# Altium PCB ZYNQ-HS-DEV-PCB.PcbDoc (part 2 of 10)
Units mm, origin at the board's own origin, x right, y up, seen from the top; angles counter-clockwise.
Board outline 125.25 x 111 mm, 10 copper layers (S1 (SIG), S2 (GND), S3 (SIG), S4 (GND), S5 (PWR), S6 (SIG), S7 (GND), S8 (SIG), S9 (GND), S10 (SIG)), stack 1.597 mm thick; 539 components, 408 nets, 2443 pads, 876 vias.
Unrouted connection lines stored in the file: 1310.
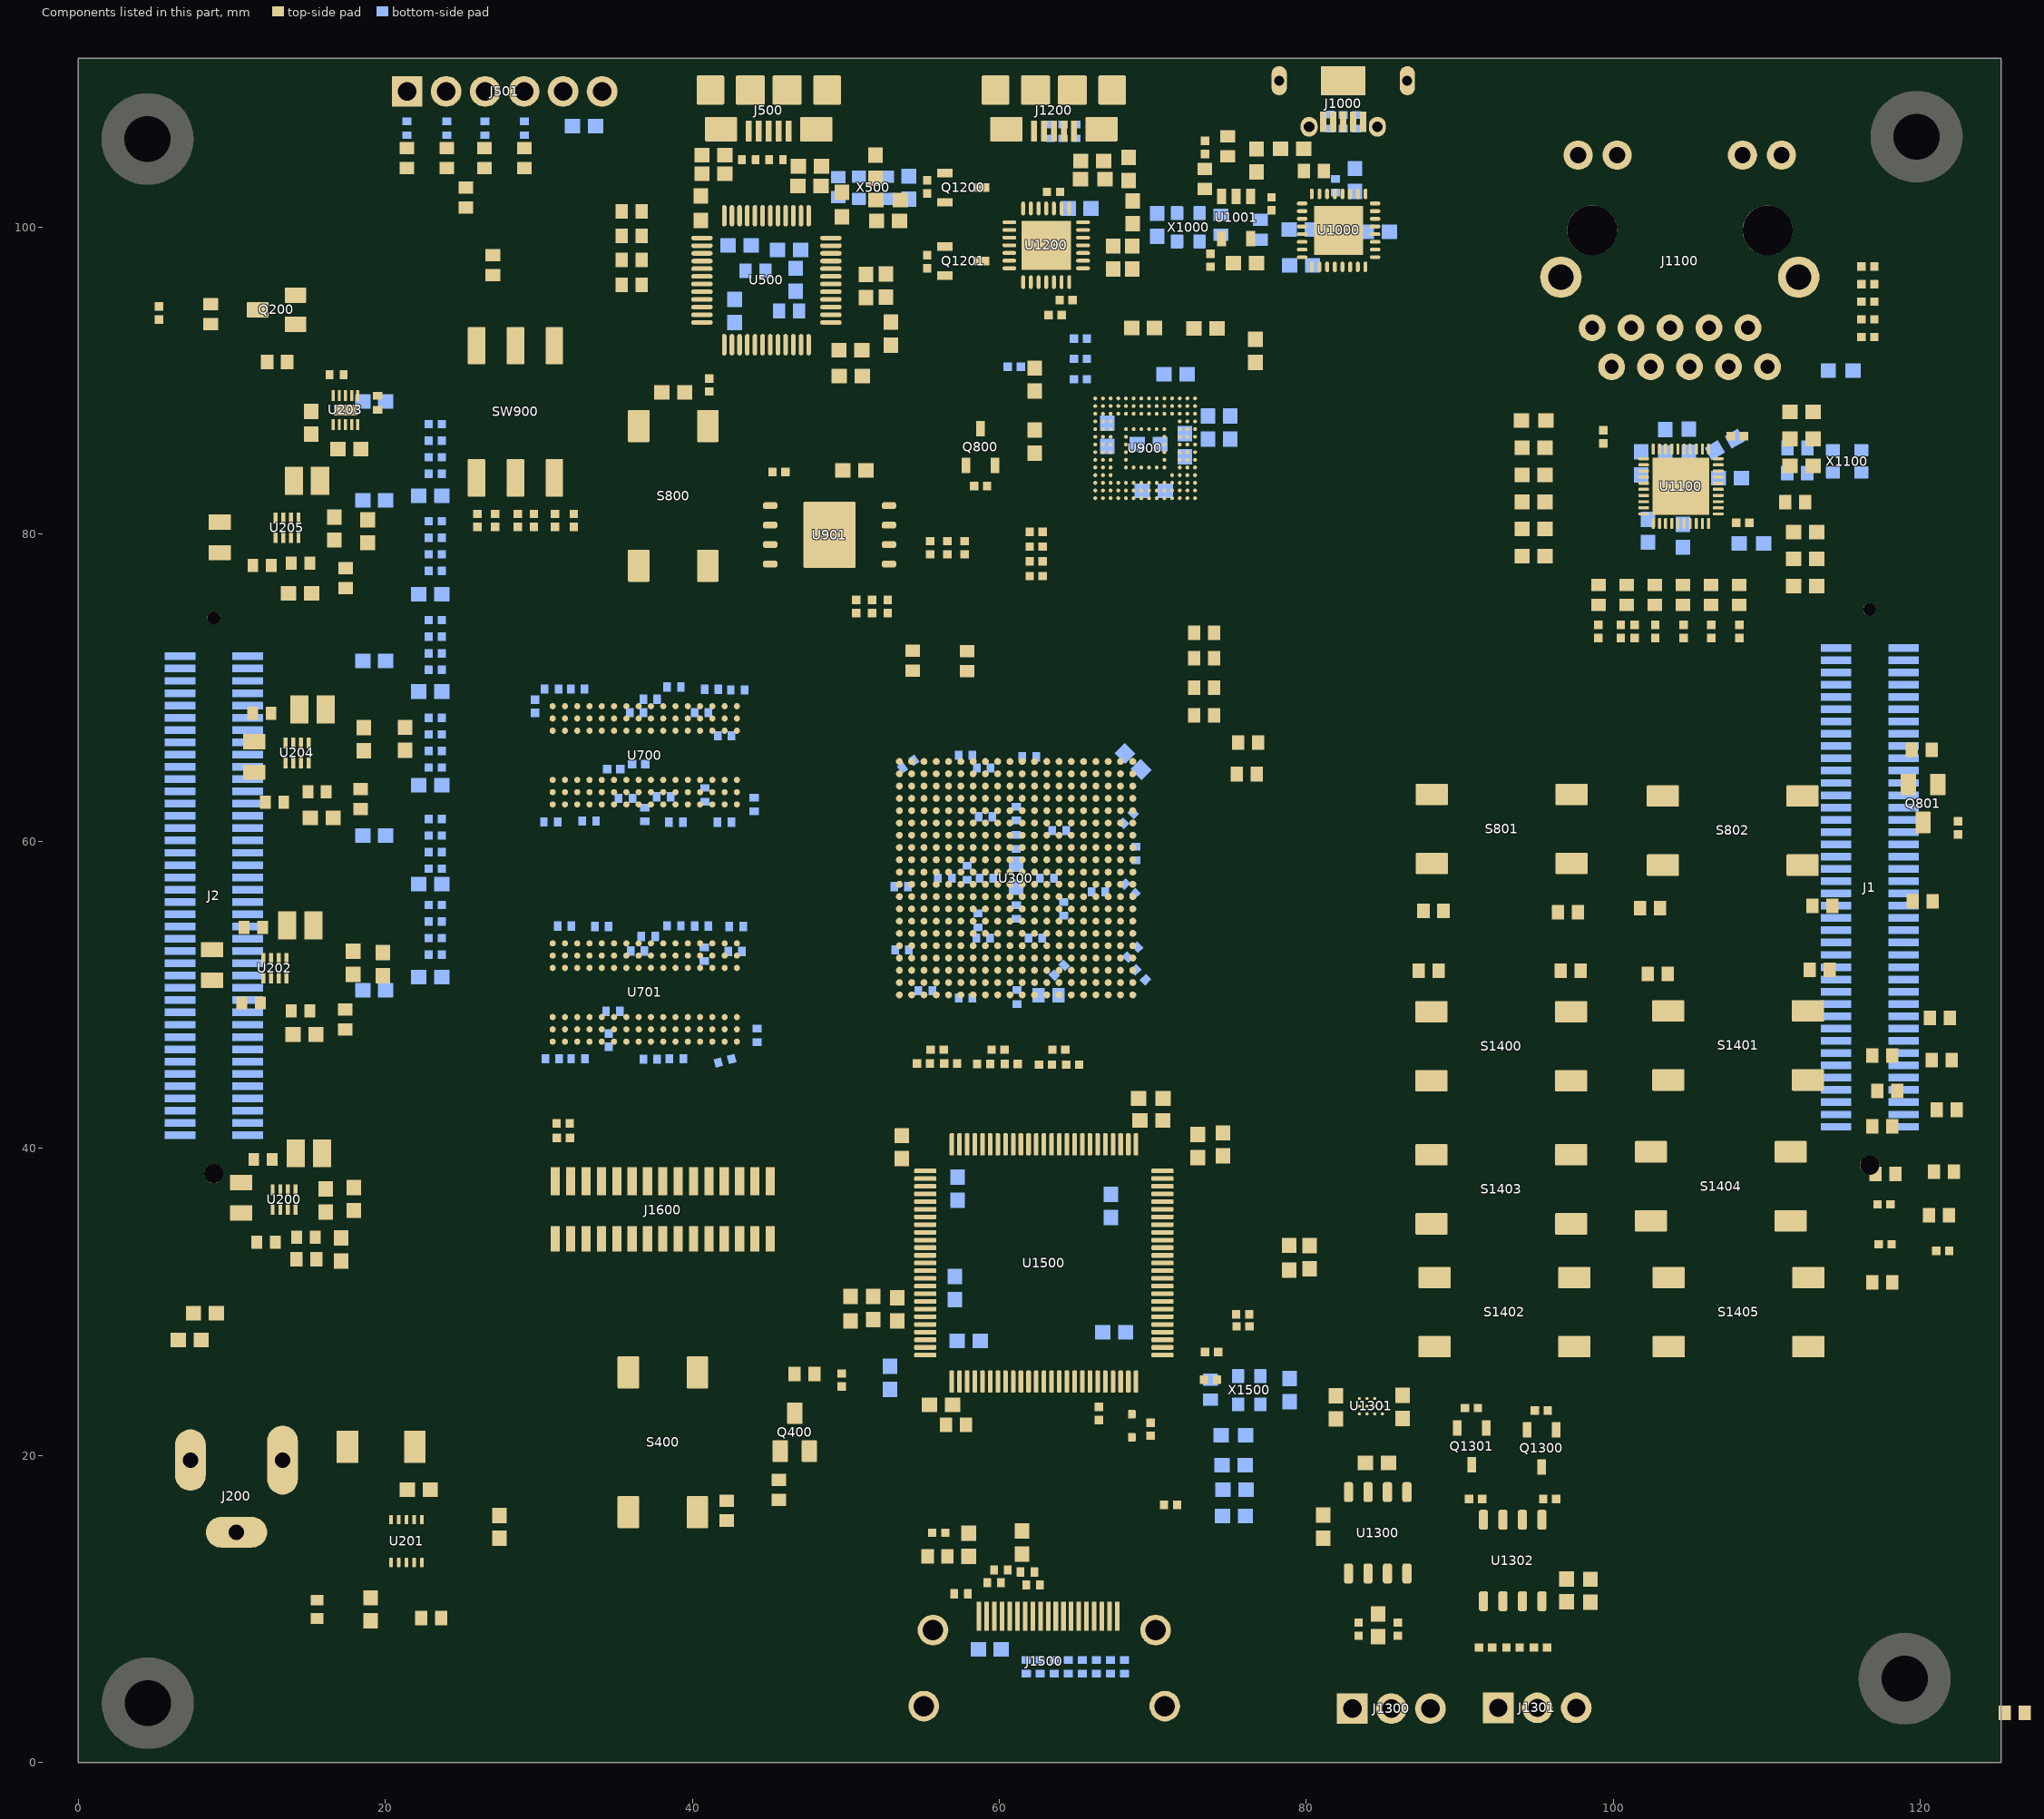
[diagram p7: the components of this part, seen from the top]

## Components (designator, comment, footprint, x,y, rotation, side; value= is the part's Value field where it differs from the comment) (continued)
R906 "20k" 0402RESC1005X04N 65.275,92.75 r180 bottom value="20 kOhms"
R907 "DNP" 0402RESC1005X04N 60.975,90.916 r0 bottom value=***
R908 "20k" 0402RESC1005X04N 45.645,84.057 r0 top value="20 kOhms"
R909 "DNP" 0402RESC1005X04N 50.68,75.292 r90 top value=***
R910 "DNP" 0402RESC1005X04N 57.742,79.122 r90 top value=***
R911 "20k" 0402RESC1005X04N 27.15,80.904 r270 top value="20 kOhms"
R912 "20k" 0402RESC1005X04N 52.731,75.292 r90 top value="20 kOhms"
R913 "20k" 0402RESC1005X04N 55.495,79.122 r90 top value="20 kOhms"
R914 "20k" 0402RESC1005X04N 29.675,80.904 r270 top value="20 kOhms"
R915 "20k" 0402RESC1005X04N 32.282,80.904 r270 top value="20 kOhms"
R916 "1k" 0402RESC1005X04N 51.706,75.292 r270 top value="1 kOhms"
R917 "1k" 0402RESC1005X04N 56.619,79.122 r270 top value="1 kOhms"
R918 "1k" 0402RESC1005X04N 25.993,80.904 r90 top value="1 kOhms"
R919 "1k" 0402RESC1005X04N 28.634,80.904 r90 top value="1 kOhms"
R920 "1k" 0402RESC1005X04N 31.054,80.904 r90 top value="1 kOhms"
R1000 "1k" 0603RESC1608X05N 80.475,103.675 r180 top value="1 kOhms"
R1001 "1k" 0603RESC1608X05N 77,99.825 r270 bottom value="1 kOhms"
R1002 "22R" 0603RESC1608X05N 74.429,100.153 r90 bottom value="22 Ohms"
R1003 "20k" 0402RESC1005X04N 73.4,105.2 r270 top value="20 kOhms"
R1004 "10k" 0603RESC1608X05N 74.875,105.275 r90 top value="10 kOhms"
R1005 "8k06" 0402RESC1005X04N 77.725,101.525 r90 top value="8.06 kOhms"
R1006 "20k" 0402RESC1005X04N 73.749,97.852 r90 top value="20 kOhms"
R1100 "4k7" 0402RESC1005X04N 104.575,73.675 r270 top value="4.7 kOhms"
R1101 "4k7" 0402RESC1005X04N 102.725,73.675 r270 top value="4.7 kOhms"
R1102 "DNP" 0402RESC1005X04N 101.375,73.675 r270 top value=***
R1103 "4k7" 0402RESC1005X04N 99.025,73.675 r270 top value="4.7 kOhms"
R1104 "22R" 0603RESC1608X05N 104.53,76.05 r270 top value="22 Ohms"
R1105 "22R" 0603RESC1608X05N 102.695,76.05 r270 top value="22 Ohms"
R1106 "22R" 0603RESC1608X05N 100.86,76.05 r270 top value="22 Ohms"
R1107 "22R" 0603RESC1608X05N 99.025,76.05 r270 top value="22 Ohms"
R1108 "22R" 0603RESC1608X05N 106.365,76.05 r270 top value="22 Ohms"
R1109 "22R" 0603RESC1608X05N 108.2,76.05 r270 top value="22 Ohms"
R1110 "1k" 0402RESC1005X04N 108.2,73.675 r90 top value="1 kOhms"
R1111 "1k" 0402RESC1005X04N 106.375,73.675 r90 top value="1 kOhms"
R1112 "1k" 0402RESC1005X04N 100.475,73.675 r90 top value="1 kOhms"
R1113 "1k" 0402RESC1005X04N 99.35,86.35 r90 top value="1 kOhms"
R1114 "1k" 0402RESC1005X04N 108.425,80.75 r0 top value="1 kOhms"
R1115 "4k7" 0402RESC1005X04N 116.575,94 r180 top value="4.7 kOhms"
R1116 "4k7" 0402RESC1005X04N 116.575,96.3 r180 top value="4.7 kOhms"
R1117 "22R" 0603RESC1608X05N 111.975,83.975 r0 bottom value="22 Ohms"
R1118 "1k" 0402RESC1005X04N 116.575,92.85 r180 top value="1 kOhms"
R1119 "22R" 0603RESC1608X05N 112,85.625 r0 bottom value="22 Ohms"
R1120 "4k7" 0402RESC1005X04N 116.575,95.15 r0 top value="4.7 kOhms"
R1121 "22R" 0603RESC1608X05N 111.85,82.1 r0 top value="22 Ohms"
R1122 "1k" 0402RESC1005X04N 116.575,97.45 r180 top value="1 kOhms"
R1123 "2k49" 0402RESC1005X04N 108.075,86.4 r0 top value="2.49 kOhms"
R1200 "4k7" 0402RESC1005X04N 64.35,95.25 r180 top value="4.7 kOhms"
R1201 "4k7" 0402RESC1005X04N 55.3,102.625 r270 top value="4.7 kOhms"
R1202 "4k7" 0402RESC1005X04N 63.525,102.3 r180 top value="4.7 kOhms"
R1203 "4k7" 0402RESC1005X04N 63.625,94.275 r180 top value="4.7 kOhms"
R1204 "4k7" 0402RESC1005X04N 55.3,97.75 r270 top value="4.7 kOhms"
R1300 "60R4" 0402RESC1005X04N 85.95,8.675 r90 top value="60.4 Ohms"
R1301 "60R4" 0402RESC1005X04N 83.4,8.675 r90 top value="60.4 Ohms"
R1302 "4k7" 0402RESC1005X04N 95.3,22.925 r180 top value="4.7 kOhms"
R1303 "4k7" 0402RESC1005X04N 95.85,17.15 r180 top value="4.7 kOhms"
R1304 "DNP" 0402RESC1005X04N 91.675,7.475 r180 top value=***
R1305 "120R" 0402RESC1005X04N 93.463,7.475 r180 top value="120 Ohms"
R1306 "4k7" 0402RESC1005X04N 90.75,23.075 r180 top value="4.7 kOhms"
R1307 "4k7" 0402RESC1005X04N 91.025,17.15 r0 top value="4.7 kOhms"
R1308 "DNP" 0402RESC1005X04N 95.25,7.475 r180 top value=***
R1400 "1k" 0402RESC1005X04N 348.8,267.675 r90 top value="1 kOhms"
R1401 "1k" 0402RESC1005X04N 117.7,33.75 r180 top value="1 kOhms"
R1402 "1k" 0402RESC1005X04N 121.45,33.325 r180 top value="1 kOhms"
R1403 "10k" 0603RESC1608X05N 87.975,51.575 r0 top value="10 kOhms"
R1404 "10k" 0603RESC1608X05N 102.9,51.35 r180 top value="10 kOhms"
R1405 "10k" 0603RESC1608X05N 97.225,51.575 r0 top value="10 kOhms"
R1406 "10k" 0603RESC1608X05N 113.425,51.625 r0 top value="10 kOhms"
R1407 "1k" 0402RESC1005X04N 117.625,36.35 r180 top value="1 kOhms"
R1408 "10k" 0603RESC1608X05N 117.85,43.725 r180 top value="10 kOhms"
R1409 "10k" 0603RESC1608X05N 117.525,41.425 r180 top value="10 kOhms"
R1410 "10k" 0603RESC1608X05N 117.525,46.05 r180 top value="10 kOhms"
R1411 "10k" 0603RESC1608X05N 121.275,48.498 r180 top value="10 kOhms"
R1412 "10k" 0603RESC1608X05N 121.724,42.507 r180 top value="10 kOhms"
R1413 "10k" 0603RESC1608X05N 121.375,45.756 r180 top value="10 kOhms"
R1414 "10k" 0603RESC1608X05N 121.2,35.648 r180 top value="10 kOhms"
R1415 "10k" 0603RESC1608X05N 121.525,38.473 r180 top value="10 kOhms"
R1500 "27k" 0402RESC1005X04N 69.85,21.7 r90 top value="27 kOhms"
R1501 "49R9" 0402RESC1005X04N 56.05,14.95 r180 top value="49.9 Ohms"
R1502 "49R9" 0402RESC1005X04N 71.15,16.775 r0 top value="49.9 Ohms"
R1503 "2k49" 0402RESC1005X04N 73.75,24.935 r0 top value="2.49 kOhms"
R1504 "2k49" 0402RESC1005X04N 73.825,26.725 r0 top value="2.49 kOhms"
R1505 "10k" 0603RESC1608X05N 55.975,13.425 r0 top value="10 kOhms"
R1506 "2k49" 0402RESC1005X04N 75.875,28.4 r0 top value="2.49 kOhms"
R1507 "2k49" 0402RESC1005X04N 75.85,29.175 r0 top value="2.49 kOhms"
R1508 "2k49" 0402RESC1005X04N 66.475,22.725 r270 top value="2.49 kOhms"
R1509 "887R" 0603RESC1608X05N 57.175,21.975 r0 top value="887 Ohms"
R1510 "22R" 0603RESC1608X05N 73.75,24.285 r270 bottom value="22 Ohms"
R1600 "100R" 0402RESC1005X04N 64.775,45.45 r0 top value="100 Ohms"
R1601 "150R" 0402RESC1005X04N 63.875,46.425 r0 top value="150 Ohms"
R1602 "100R" 0402RESC1005X04N 63,45.45 r180 top value="100 Ohms"
R1603 "100R" 0402RESC1005X04N 60.775,45.5 r0 top value="100 Ohms"
R1604 "4k7" 0402RESC1005X04N 31.6,40.675 r180 top value="4.7 kOhms"
R1605 "4k7" 0402RESC1005X04N 31.584,41.624 r180 top value="4.7 kOhms"
R1606 "150R" 0402RESC1005X04N 59.912,46.425 r0 top value="150 Ohms"
R1607 "100R" 0402RESC1005X04N 58.975,45.5 r180 top value="100 Ohms"
R1608 "100R" 0402RESC1005X04N 56.825,45.525 r0 top value="100 Ohms"
R1609 "150R" 0402RESC1005X04N 55.95,46.425 r0 top value="150 Ohms"
R1610 "100R" 0402RESC1005X04N 55.05,45.525 r180 top value="100 Ohms"
S400 "TL3301EF100QG" TL3301_Tact_SW 38.075,20.85 r270 top
S800 "TL3301EF100QG" TL3301_Tact_SW 38.75,82.5 r270 top
S801 "TL3301EF100QG" TL3301_Tact_SW 92.725,60.8 r0 top
S802 "TL3301EF100QG" TL3301_Tact_SW 107.775,60.7 r0 top
S1400 "TL3301EF100QG" TL3301_Tact_SW 92.7,46.65 r180 top
S1401 "TL3301EF100QG" TL3301_Tact_SW 108.125,46.7 r180 top
S1402 "TL3301EF100QG" TL3301_Tact_SW 92.9,29.325 r180 top
S1403 "TL3301EF100QG" TL3301_Tact_SW 92.7,37.325 r180 top
S1404 "TL3301EF100QG" TL3301_Tact_SW 107,37.525 r180 top
S1405 "TL3301EF100QG" TL3301_Tact_SW 108.15,29.325 r180 top
SW900 "219-3LPST" 219-3LPST 28.476,87.979 r0 top
U200 "TPS62823DLCR" VSON50P150X100-8N 13.4,36.655 r90 top
U201 "TPS259250DRCR" VSON50P300X100_HS-11N 21.375,14.412 r270 top
U202 "TPS62823DLCR" VSON50P150X100-8N 12.8,51.72 r90 top
U203 "TPS51206DSQR" WSON2X2-10/SON40P200X80_HS-11N 17.4,88.095 r90 top
U204 "TPS62823DLCR" VSON50P150X100-8N 14.25,65.751 r90 top
U205 "TPS62823DLCR" VSON50P150X100-8N 13.596,80.42 r90 top
U300 "XC7Z020-2CLG400I" BGA400C80P20X20_1700X1700X147 61.088,57.595 r0 top
U500 "FT232HL" LQFP50P900X900X160-48N 44.825,96.55 r270 top
U700 "MT41K256M16TW-107 IT:P" BGA96C80P9X16_900X1400X110 36.9,65.6 r270 top
U701 "MT41K256M16TW-107 IT:P" BGA96C80P9X16_900X1400X110 36.9,50.15 r270 top
U800 "NL17SZ17DFT2G" SOT65P210X110-5N 446.949,235.487 r90 top
U802 "NC7WZ07P6X" NC7WZ07 308.292,235.812 r90 top
U803 "NL17SZ17DFT2G" SOT65P210X110-5N 293.316,235.487 r90 top
U900 "FEMC008GSTE9-T14-16" BGA153C50P14X14_1150X1300X100 69.496,85.6 r180 top
U901 "W25Q256JVEIQ" WSON8X6-SON127P800X80_HS-9N 48.937,79.963 r0 top
U1000 "USB3320C-EZK-TR" QFN50P500X500X100_HS-33N 82.1,99.8 r90 top
U1001 "TPS2051BDBVR" SOT95P280X125-5N 75.425,100.625 r270 top
U1100 "RTL8211F-CG" QFN40P500X500X90_HS-41N 104.4,83.125 r270 top
U1200 "CP2102-GM" QFN50P500X500X100_HS-29N 63.05,98.825 r180 top
U1300 "TJA1040T/CM,118" SOIC127P600X175-8N 84.645,14.95 r270 top
U1301 "TXS0104EYZTR" BGA12C50P3X4 84.2,23.2 r90 top
U1302 "MAX3485ESA+T" SOIC127P600X175-8N 93.44,13.15 r270 top
U1500 "ADV7511KSTZ" LQFP50P1600X1600X160-100N 62.9,32.525 r0 top
X500 "ECS-2520MV-120-BN-TR" XTAL_2520 51.775,102.575 r180 bottom
X800 "ASDDV-33.3333MHZ-LC-T" XTAL_2520 187.686,235.537 r90 top
X1000 "ECS-2520MV-120-BN-TR" XTAL_2520 72.303,100 r90 bottom
X1100 "ASDDV-25.000MHZ-LC-T" XTAL_2520 115.225,84.75 r180 bottom
X1500 "ECS-2520MV-120-BN-TR" XTAL_2520 76.275,24.235 r270 bottom

## Footprints (in the part's own frame and the unit in brackets; to place one, negate y for a bottom-side part, rotate by r counter-clockwise, add the part's x,y. Pads: shape width x height; smd on the part's side, far side on the other; paste and mask are expansions set on the pad)
219-3LPST [mm]
  rrect10% 1.13x2.44 smd mask+0: 1(-2.54,-4.305) 2(0,-4.305) 3(2.54,-4.305) 4(2.54,4.305) 5(0,4.305) 6(-2.54,4.305)
  silkscreen extent -3.03,-2.39 2.97,2.36, body extent -4.54,-4.95 4.54,4.95, height 4.31
0402CAPC1005X06N [mm] "Chip Capacitor, 2-Leads, Body 1,00x0,50mm, IPC Medium Density"
  rect 0.5x0.6 smd mask+0.05: 1(-0.45,0) 2(0.45,0)
  body extent -0.53,-0.28 0.53,0.28, height 0.55
0402DIOC1005X06N [mm] "Chip Diode 2-Leads, Body 1,00x0,50mm, IPC Medium Density"
  rrect10% 0.5x0.6 smd mask+0.05: 1(-0.45,0) 2(0.45,0)
  body extent -0.5,-0.25 0.5,0.25, height 0.55
0402RESC1005X04N [mm] "Chip Resistor, 2-Leads, Body 1,00x0,50mm, IPC Medium Density"
  rect 0.55x0.55 smd mask+0.05: 1(-0.425,0) 2(0.425,0)
  body extent -0.55,-0.28 0.55,0.28, height 0.35
0603_LED_1608N [mm] "LED, 2-Leads, Body 1,58x0,85mm, IPC Medium Density"
  rect 0.8x0.95 smd mask+0.05: 1(-0.65,0) 2(0.65,0)
  body extent -0.8,-0.4 0.8,0.4, height 0.66
0603CAPC1608X09N [mm] "Chip Capacitor, 2-Leads, Body 1,60x0,80mm, IPC Medium Density"
  rect 1x0.95 smd mask+0.05: 1(-0.75,0) 2(0.75,0)
  body extent -0.85,-0.45 0.85,0.45, height 0.9
0603INDC1608X08N [mm] "Chip Inductor, 2-Leads, Body 1,60x0,80mm, IPC Medium Density"
  rect 1x0.95 smd mask+0.05: 1(-0.8,0) 2(0.8,0)
  body extent -0.87,-0.48 0.87,0.48, height 0.75
0603RESC1608X05L [mm] "Chip Resistor, 2-Leads, Body 1,58x0,85mm, IPC High Density"
  rect 0.7x0.85 smd mask+0.05: 1(-0.6,0) 2(0.6,0)
  body extent -0.82,-0.48 0.82,0.48, height 0.5
0603RESC1608X05N [mm] "Chip Resistor, 2-Leads, Body 1,58x0,85mm, IPC Medium Density"
  rect 0.8x0.95 smd mask+0.05: 1(-0.65,0) 2(0.65,0)
  body extent -0.82,-0.48 0.82,0.48, height 0.5
0805CAPC2012X14N [mm] "Chip Capacitor, 2-Leads, Body 2,00x1,25mm, IPC Medium Density"
  rect 1x1.45 smd mask+0.05: 1(-1,0) 2(1,0)
  body extent -1.07,-0.7 1.07,0.7, height 1.4
0806INDC2016X10N [mm] "Chip Inductor, 2-Leads, Body 2,00x1,60mm, IPC Medium Density"
  rect 1.19x1.82 smd mask+0.05: 1(-0.855,0) 2(0.855,0)
  body extent -1.1,-0.9 1.1,0.9, height 1
1210CAPC3225X27N [mm] "Chip Capacitor, 2-Leads, Body 3,20x2,50mm, IPC Medium Density"
  rect 1.55x2.7 smd: 1(-1.4,0) 2(1.4,0)
  silkscreen extent -0.15,-1.25 0.15,1.25, body extent -1.75,-1.35 1.75,1.35, height 2.7
10144518-082802LF [mm] "10144518-082802LF"
  rect 0.5x2 smd mask+0.05: 1(-15.6,2.2) 2(-15.6,-2.2) 3(-14.8,2.2) 4(-14.8,-2.2) 5(-14,2.2) 6(-14,-2.2) 7(-13.2,2.2) 8(-13.2,-2.2) 9(-12.4,2.2) 10(-12.4,-2.2) 11(-11.6,2.2) 12(-11.6,-2.2) 13(-10.8,2.2) 14(-10.8,-2.2) 15(-10,2.2) 16(-10,-2.2) 17(-9.2,2.2) 18(-9.2,-2.2) 19(-8.4,2.2) 20(-8.4,-2.2) 21(-7.6,2.2) 22(-7.6,-2.2) 23(-6.8,2.2) 24(-6.8,-2.2) 25(-6,2.2) 26(-6,-2.2) 27(-5.2,2.2) 28(-5.2,-2.2) 29(-4.4,2.2) 30(-4.4,-2.2) 31(-3.6,2.2) 32(-3.6,-2.2) 33(-2.8,2.2) 34(-2.8,-2.2) 35(-2,2.2) 36(-2,-2.2) 37(-1.2,2.2) 38(-1.2,-2.2) 39(-0.4,2.2) 40(-0.4,-2.2) 41(0.4,2.2) 42(0.4,-2.2) 43(1.2,2.2) 44(1.2,-2.2) 45(2,2.2) 46(2,-2.2) 47(2.8,2.2) 48(2.8,-2.2) 49(3.6,2.2) 50(3.6,-2.2) 51(4.4,2.2) 52(4.4,-2.2) 53(5.2,2.2) 54(5.2,-2.2) 55(6,2.2) 56(6,-2.2) 57(6.8,2.2) 58(6.8,-2.2) 59(7.6,2.2) 60(7.6,-2.2) 61(8.4,2.2) 62(8.4,-2.2) 63(9.2,2.2) 64(9.2,-2.2) 65(10,2.2) 66(10,-2.2) 67(10.8,2.2) 68(10.8,-2.2) 69(11.6,2.2) 70(11.6,-2.2) 71(12.4,2.2) 72(12.4,-2.2) 73(13.2,2.2) 74(13.2,-2.2) 75(14,2.2) 76(14,-2.2) 77(14.8,2.2) 78(14.8,-2.2) 79(15.6,2.2) 80(15.6,-2.2)
  round 0.85 hole 0.85 unplated: MH(-18.1,0)
  round 1.25 hole 1.25 unplated: MH(18.1,0)
  silkscreen extent -19.25,-3.25 19.25,4.15, body extent -18.9,-3 18.9,3, height 5.71
AMPHENOL_10029449-111RLF [mm]
  rect 0.3x1.9 smd mask+0.05: 1(4.75,4.213) 2(4.25,4.213) 3(3.75,4.213) 4(3.25,4.213) 5(2.75,4.213) 6(2.25,4.213) 7(1.75,4.213) 8(1.25,4.213) 9(0.75,4.213) 10(0.25,4.213) 11(-0.25,4.213) 12(-0.75,4.213) 13(-1.25,4.213) 14(-1.75,4.213) 15(-2.25,4.213) 16(-2.75,4.213) 17(-3.25,4.213) 18(-3.75,4.213) 19(-4.25,4.213)
  round 1.995 hole 1.33: S1(-7.25,3.313) S2(7.25,3.313) S3(-7.85,-1.637) S4(7.85,-1.637)
  silkscreen extent -7.5,-4.19 7.5,5.86, body extent -8.1,-5.16 8.1,4.94, height 6.26
BGA12C50P3X4 [mm]
  round 0.2 smd paste+0 mask+0.05: A1(-0.5,0.75) A2(0,0.75) A3(0.5,0.75) B1(-0.5,0.25) B2(0,0.25) B3(0.5,0.25) C1(-0.5,-0.25) C2(0,-0.25) C3(0.5,-0.25) D1(-0.5,-0.75) D2(0,-0.75)
  silkscreen extent -1.35,-1.26 0.99,1.29, body extent -0.88,-1.17 0.98,1.19, height 0.25
BGA96C80P9X16_900X1400X110 [mm] "BGA, 96-Leads, Body 9,00x14,00mmx1,10mm, Pitch 0,80mm"
  round 0.4 smd mask+0.05: A1(-3.2,6) A2(-2.4,6) A3(-1.6,6) A7(1.6,6) A8(2.4,6) A9(3.2,6) B1(-3.2,5.2) B2(-2.4,5.2) B3(-1.6,5.2) B7(1.6,5.2) B8(2.4,5.2) B9(3.2,5.2) C1(-3.2,4.4) C2(-2.4,4.4) C3(-1.6,4.4) C7(1.6,4.4) C8(2.4,4.4) C9(3.2,4.4) D1(-3.2,3.6) D2(-2.4,3.6) D3(-1.6,3.6) D7(1.6,3.6) D8(2.4,3.6) D9(3.2,3.6) E1(-3.2,2.8) E2(-2.4,2.8) E3(-1.6,2.8) E7(1.6,2.8) E8(2.4,2.8) E9(3.2,2.8) F1(-3.2,2) F2(-2.4,2) F3(-1.6,2) F7(1.6,2) F8(2.4,2) F9(3.2,2) G1(-3.2,1.2) G2(-2.4,1.2) G3(-1.6,1.2) G7(1.6,1.2) G8(2.4,1.2) G9(3.2,1.2) H1(-3.2,0.4) H2(-2.4,0.4) H3(-1.6,0.4) H7(1.6,0.4) H8(2.4,0.4) H9(3.2,0.4) J1(-3.2,-0.4) J2(-2.4,-0.4) J3(-1.6,-0.4) J7(1.6,-0.4) J8(2.4,-0.4) J9(3.2,-0.4) K1(-3.2,-1.2) K2(-2.4,-1.2) K3(-1.6,-1.2) K7(1.6,-1.2) K8(2.4,-1.2) K9(3.2,-1.2) L1(-3.2,-2) L2(-2.4,-2) L3(-1.6,-2) L7(1.6,-2) L8(2.4,-2) L9(3.2,-2) M1(-3.2,-2.8) M2(-2.4,-2.8) M3(-1.6,-2.8) M7(1.6,-2.8) M8(2.4,-2.8) M9(3.2,-2.8) N1(-3.2,-3.6) N2(-2.4,-3.6) N3(-1.6,-3.6) N7(1.6,-3.6) N8(2.4,-3.6) N9(3.2,-3.6) P1(-3.2,-4.4) P2(-2.4,-4.4) P3(-1.6,-4.4) P7(1.6,-4.4) P8(2.4,-4.4) P9(3.2,-4.4) R1(-3.2,-5.2) R2(-2.4,-5.2) R3(-1.6,-5.2) R7(1.6,-5.2) R8(2.4,-5.2) R9(3.2,-5.2) T1(-3.2,-6) T2(-2.4,-6) T3(-1.6,-6) T7(1.6,-6) T8(2.4,-6) T9(3.2,-6)
  silkscreen extent -5.27,-7 4.5,7, body extent -4.5,-7 4.5,7, height 1.1
BGA153C50P14X14_1150X1300X100 [mm] "FBGA, 153-Leads, Body 11,50x13,00mmx1,00mm, Pitch 0,50mm"
  round 0.25 smd mask+0.05: A1(-3.25,3.25) A2(-2.75,3.25) A3(-2.25,3.25) A4(-1.75,3.25) A5(-1.25,3.25) A6(-0.75,3.25) A7(-0.25,3.25) A8(0.25,3.25) A9(0.75,3.25) A10(1.25,3.25) A11(1.75,3.25) A12(2.25,3.25) A13(2.75,3.25) A14(3.25,3.25) B1(-3.25,2.75) B2(-2.75,2.75) B3(-2.25,2.75) B4(-1.75,2.75) B5(-1.25,2.75) B6(-0.75,2.75) B7(-0.25,2.75) B8(0.25,2.75) B9(0.75,2.75) B10(1.25,2.75) B11(1.75,2.75) B12(2.25,2.75) B13(2.75,2.75) B14(3.25,2.75) C1(-3.25,2.25) C2(-2.75,2.25) C3(-2.25,2.25) C4(-1.75,2.25) C5(-1.25,2.25) C6(-0.75,2.25) C7(-0.25,2.25) C8(0.25,2.25) C9(0.75,2.25) C10(1.25,2.25) C11(1.75,2.25) C12(2.25,2.25) C13(2.75,2.25) C14(3.25,2.25) D1(-3.25,1.75) D2(-2.75,1.75) D3(-2.25,1.75) D4(-1.75,1.75) D12(2.25,1.75) D13(2.75,1.75) D14(3.25,1.75) E1(-3.25,1.25) E2(-2.75,1.25) E3(-2.25,1.25) E5(-1.25,1.25) E6(-0.75,1.25) E7(-0.25,1.25) E8(0.25,1.25) E9(0.75,1.25) E10(1.25,1.25) E12(2.25,1.25) E13(2.75,1.25) E14(3.25,1.25) F1(-3.25,0.75) F2(-2.75,0.75) F3(-2.25,0.75) F5(-1.25,0.75) F10(1.25,0.75) F12(2.25,0.75) F13(2.75,0.75) F14(3.25,0.75) G1(-3.25,0.25) G2(-2.75,0.25) G3(-2.25,0.25) G5(-1.25,0.25) G10(1.25,0.25) G12(2.25,0.25) G13(2.75,0.25) G14(3.25,0.25) H1(-3.25,-0.25) H2(-2.75,-0.25) H3(-2.25,-0.25) H5(-1.25,-0.25) H10(1.25,-0.25) H12(2.25,-0.25) H13(2.75,-0.25) H14(3.25,-0.25) J1(-3.25,-0.75) J2(-2.75,-0.75) J3(-2.25,-0.75) J5(-1.25,-0.75) J10(1.25,-0.75) J12(2.25,-0.75) J13(2.75,-0.75) J14(3.25,-0.75) K1(-3.25,-1.25) K2(-2.75,-1.25) K3(-2.25,-1.25) K5(-1.25,-1.25) K6(-0.75,-1.25) K7(-0.25,-1.25) K8(0.25,-1.25) K9(0.75,-1.25) K10(1.25,-1.25) K12(2.25,-1.25) K13(2.75,-1.25) K14(3.25,-1.25) L1(-3.25,-1.75) L2(-2.75,-1.75) L3(-2.25,-1.75) L12(2.25,-1.75) L13(2.75,-1.75) L14(3.25,-1.75) M1(-3.25,-2.25) M2(-2.75,-2.25) M3(-2.25,-2.25) M4(-1.75,-2.25) M5(-1.25,-2.25) M6(-0.75,-2.25) M7(-0.25,-2.25) M8(0.25,-2.25) M9(0.75,-2.25) M10(1.25,-2.25) M11(1.75,-2.25) M12(2.25,-2.25) M13(2.75,-2.25) M14(3.25,-2.25) N1(-3.25,-2.75) N2(-2.75,-2.75) N3(-2.25,-2.75) N4(-1.75,-2.75) N5(-1.25,-2.75) N6(-0.75,-2.75) N7(-0.25,-2.75) N8(0.25,-2.75) N9(0.75,-2.75) N10(1.25,-2.75) N11(1.75,-2.75) N12(2.25,-2.75) N13(2.75,-2.75) N14(3.25,-2.75) P1(-3.25,-3.25) P2(-2.75,-3.25) P3(-2.25,-3.25) P4(-1.75,-3.25) P5(-1.25,-3.25) P6(-0.75,-3.25) P7(-0.25,-3.25) P8(0.25,-3.25) P9(0.75,-3.25) P10(1.25,-3.25) P11(1.75,-3.25) P12(2.25,-3.25) P13(2.75,-3.25) P14(3.25,-3.25)
  silkscreen extent -6.53,-6.5 5.75,6.5, body extent -5.75,-6.5 5.75,6.5, height 1
BGA400C80P20X20_1700X1700X147 [mm] "BGA, 400-Leads, Body 17,00x17,00mmx1,47mm, Pitch 0,80mm"
  round 0.45 smd mask+0.06: A1(-7.6,7.6) A2(-6.8,7.6) A3(-6,7.6) A4(-5.2,7.6) A5(-4.4,7.6) A6(-3.6,7.6) A7(-2.8,7.6) A8(-2,7.6) A9(-1.2,7.6) A10(-0.4,7.6) A11(0.4,7.6) A12(1.2,7.6) A13(2,7.6) A14(2.8,7.6) A15(3.6,7.6) A16(4.4,7.6) A17(5.2,7.6) A18(6,7.6) A19(6.8,7.6) A20(7.6,7.6) B1(-7.6,6.8) B2(-6.8,6.8) B3(-6,6.8) B4(-5.2,6.8) B5(-4.4,6.8) B6(-3.6,6.8) B7(-2.8,6.8) B8(-2,6.8) B9(-1.2,6.8) B10(-0.4,6.8) B11(0.4,6.8) B12(1.2,6.8) B13(2,6.8) B14(2.8,6.8) B15(3.6,6.8) B16(4.4,6.8) B17(5.2,6.8) B18(6,6.8) B19(6.8,6.8) B20(7.6,6.8) C1(-7.6,6) C2(-6.8,6) C3(-6,6) C4(-5.2,6) C5(-4.4,6) C6(-3.6,6) C7(-2.8,6) C8(-2,6) C9(-1.2,6) C10(-0.4,6) C11(0.4,6) C12(1.2,6) C13(2,6) C14(2.8,6) C15(3.6,6) C16(4.4,6) C17(5.2,6) C18(6,6) C19(6.8,6) C20(7.6,6) D1(-7.6,5.2) D2(-6.8,5.2) D3(-6,5.2) D4(-5.2,5.2) D5(-4.4,5.2) D6(-3.6,5.2) D7(-2.8,5.2) D8(-2,5.2) D9(-1.2,5.2) D10(-0.4,5.2) D11(0.4,5.2) D12(1.2,5.2) D13(2,5.2) D14(2.8,5.2) D15(3.6,5.2) D16(4.4,5.2) D17(5.2,5.2) D18(6,5.2) D19(6.8,5.2) D20(7.6,5.2) E1(-7.6,4.4) E2(-6.8,4.4) E3(-6,4.4) E4(-5.2,4.4) E5(-4.4,4.4) E6(-3.6,4.4) E7(-2.8,4.4) E8(-2,4.4) E9(-1.2,4.4) E10(-0.4,4.4) E11(0.4,4.4) E12(1.2,4.4) E13(2,4.4) E14(2.8,4.4) E15(3.6,4.4) E16(4.4,4.4) E17(5.2,4.4) E18(6,4.4) E19(6.8,4.4) E20(7.6,4.4) F1(-7.6,3.6) F2(-6.8,3.6) F3(-6,3.6) F4(-5.2,3.6) F5(-4.4,3.6) F6(-3.6,3.6) F7(-2.8,3.6) F8(-2,3.6) F9(-1.2,3.6) F10(-0.4,3.6) F11(0.4,3.6) F12(1.2,3.6) F13(2,3.6) F14(2.8,3.6) F15(3.6,3.6) F16(4.4,3.6) F17(5.2,3.6) F18(6,3.6) F19(6.8,3.6) F20(7.6,3.6) G1(-7.6,2.8) G2(-6.8,2.8) G3(-6,2.8) G4(-5.2,2.8) G5(-4.4,2.8) G6(-3.6,2.8) G7(-2.8,2.8) G8(-2,2.8) G9(-1.2,2.8) G10(-0.4,2.8) G11(0.4,2.8) G12(1.2,2.8) G13(2,2.8) G14(2.8,2.8) G15(3.6,2.8) G16(4.4,2.8) G17(5.2,2.8) G18(6,2.8) G19(6.8,2.8) G20(7.6,2.8) H1(-7.6,2) H2(-6.8,2) H3(-6,2) H4(-5.2,2) H5(-4.4,2) H6(-3.6,2) H7(-2.8,2) H8(-2,2) H9(-1.2,2) H10(-0.4,2) H11(0.4,2) H12(1.2,2) H13(2,2) H14(2.8,2) H15(3.6,2) H16(4.4,2) H17(5.2,2) H18(6,2) H19(6.8,2) H20(7.6,2) J1(-7.6,1.2) J2(-6.8,1.2) J3(-6,1.2) J4(-5.2,1.2) J5(-4.4,1.2) J6(-3.6,1.2) J7(-2.8,1.2) J8(-2,1.2) J9(-1.2,1.2) J10(-0.4,1.2) J11(0.4,1.2) J12(1.2,1.2) J13(2,1.2) J14(2.8,1.2) J15(3.6,1.2) J16(4.4,1.2) J17(5.2,1.2) J18(6,1.2) J19(6.8,1.2) J20(7.6,1.2) K1(-7.6,0.4) K2(-6.8,0.4) K3(-6,0.4) K4(-5.2,0.4) K5(-4.4,0.4) K6(-3.6,0.4) K7(-2.8,0.4) K8(-2,0.4) K9(-1.2,0.4) K10(-0.4,0.4) K11(0.4,0.4) K12(1.2,0.4) K13(2,0.4) K14(2.8,0.4) K15(3.6,0.4) K16(4.4,0.4) K17(5.2,0.4) K18(6,0.4) K19(6.8,0.4) K20(7.6,0.4) L1(-7.6,-0.4) L2(-6.8,-0.4) L3(-6,-0.4) L4(-5.2,-0.4) L5(-4.4,-0.4) L6(-3.6,-0.4) L7(-2.8,-0.4) L8(-2,-0.4) L9(-1.2,-0.4) L10(-0.4,-0.4) L11(0.4,-0.4) L12(1.2,-0.4) L13(2,-0.4) L14(2.8,-0.4) L15(3.6,-0.4) L16(4.4,-0.4) L17(5.2,-0.4) L18(6,-0.4) L19(6.8,-0.4) L20(7.6,-0.4) M1(-7.6,-1.2) M2(-6.8,-1.2) M3(-6,-1.2) M4(-5.2,-1.2) M5(-4.4,-1.2) M6(-3.6,-1.2) M7(-2.8,-1.2) M8(-2,-1.2) M9(-1.2,-1.2) M10(-0.4,-1.2) M11(0.4,-1.2) M12(1.2,-1.2) M13(2,-1.2) M14(2.8,-1.2) M15(3.6,-1.2) M16(4.4,-1.2) M17(5.2,-1.2) M18(6,-1.2) M19(6.8,-1.2) M20(7.6,-1.2) N1(-7.6,-2) N2(-6.8,-2) N3(-6,-2) N4(-5.2,-2) N5(-4.4,-2) N6(-3.6,-2) N7(-2.8,-2) N8(-2,-2) N9(-1.2,-2) N10(-0.4,-2) N11(0.4,-2) N12(1.2,-2) N13(2,-2) N14(2.8,-2) N15(3.6,-2) N16(4.4,-2) N17(5.2,-2) N18(6,-2) N19(6.8,-2) N20(7.6,-2) P1(-7.6,-2.8) P2(-6.8,-2.8) P3(-6,-2.8) P4(-5.2,-2.8) P5(-4.4,-2.8) P6(-3.6,-2.8) P7(-2.8,-2.8) P8(-2,-2.8) P9(-1.2,-2.8) P10(-0.4,-2.8) P11(0.4,-2.8) P12(1.2,-2.8) P13(2,-2.8) P14(2.8,-2.8) P15(3.6,-2.8) P16(4.4,-2.8) P17(5.2,-2.8) P18(6,-2.8) P19(6.8,-2.8) P20(7.6,-2.8) R1(-7.6,-3.6) R2(-6.8,-3.6) R3(-6,-3.6) R4(-5.2,-3.6) R5(-4.4,-3.6) R6(-3.6,-3.6) R7(-2.8,-3.6) R8(-2,-3.6) R9(-1.2,-3.6) R10(-0.4,-3.6) R11(0.4,-3.6) R12(1.2,-3.6) R13(2,-3.6) R14(2.8,-3.6) R15(3.6,-3.6) R16(4.4,-3.6) R17(5.2,-3.6) R18(6,-3.6) R19(6.8,-3.6) R20(7.6,-3.6) T1(-7.6,-4.4) T2(-6.8,-4.4) T3(-6,-4.4) T4(-5.2,-4.4) T5(-4.4,-4.4) T6(-3.6,-4.4) T7(-2.8,-4.4) T8(-2,-4.4) T9(-1.2,-4.4) T10(-0.4,-4.4) T11(0.4,-4.4) T12(1.2,-4.4) T13(2,-4.4) T14(2.8,-4.4) T15(3.6,-4.4) T16(4.4,-4.4) T17(5.2,-4.4) T18(6,-4.4) T19(6.8,-4.4) T20(7.6,-4.4) U1(-7.6,-5.2) U2(-6.8,-5.2) U3(-6,-5.2) U4(-5.2,-5.2) U5(-4.4,-5.2) U6(-3.6,-5.2) U7(-2.8,-5.2) U8(-2,-5.2) U9(-1.2,-5.2) U10(-0.4,-5.2) U11(0.4,-5.2) U12(1.2,-5.2) U13(2,-5.2) U14(2.8,-5.2) U15(3.6,-5.2) U16(4.4,-5.2) U17(5.2,-5.2) U18(6,-5.2) U19(6.8,-5.2) U20(7.6,-5.2) V1(-7.6,-6) V2(-6.8,-6) V3(-6,-6) V4(-5.2,-6) V5(-4.4,-6) V6(-3.6,-6) V7(-2.8,-6) V8(-2,-6) V9(-1.2,-6) V10(-0.4,-6) V11(0.4,-6) V12(1.2,-6) V13(2,-6) V14(2.8,-6) V15(3.6,-6) V16(4.4,-6) V17(5.2,-6) V18(6,-6) V19(6.8,-6) V20(7.6,-6) W1(-7.6,-6.8) W2(-6.8,-6.8) W3(-6,-6.8) W4(-5.2,-6.8) W5(-4.4,-6.8) W6(-3.6,-6.8) W7(-2.8,-6.8) W8(-2,-6.8) W9(-1.2,-6.8) W10(-0.4,-6.8) W11(0.4,-6.8) W12(1.2,-6.8) W13(2,-6.8) W14(2.8,-6.8) W15(3.6,-6.8) W16(4.4,-6.8) W17(5.2,-6.8) W18(6,-6.8) W19(6.8,-6.8) W20(7.6,-6.8) Y1(-7.6,-7.6) Y2(-6.8,-7.6) Y3(-6,-7.6) Y4(-5.2,-7.6) Y5(-4.4,-7.6) Y6(-3.6,-7.6) Y7(-2.8,-7.6) Y8(-2,-7.6) Y9(-1.2,-7.6) Y10(-0.4,-7.6) Y11(0.4,-7.6) Y12(1.2,-7.6) Y13(2,-7.6) Y14(2.8,-7.6) Y15(3.6,-7.6) Y16(4.4,-7.6) Y17(5.2,-7.6) Y18(6,-7.6) Y19(6.8,-7.6) Y20(7.6,-7.6)
  silkscreen extent -9.27,-8.5 8.5,8.5, body extent -8.5,-8.5 8.5,8.5, height 1.47
CONN-3P-TERM-BLK [mm] "TERM BLK 3P SIDE ENT 2.54MM PCB"
  rect 2x2 hole 1.2 mask+0.07: 1(0,2.54)
  round 2 hole 1.2 mask+0.07: 2(0,0) 3(0,-2.54)
  silkscreen extent -1.6,-4 1.6,4.31, body extent -3.25,-4.01 3.25,4.01, height 3.1
CONN-6P-HEADER [mm] "CONN HEADER VERT 6POS 2.54MM"
  rect 2x2 hole 1.2 mask+0.07: 1(0,6.35)
  round 2 hole 1.2 mask+0.07: 2(0,3.81) 3(0,1.27) 4(0,-1.27) 5(0,-3.81) 6(0,-6.35)
  silkscreen extent -1.51,-7.9 1.5,7.86, body extent -1.27,-7.62 1.27,7.62, height 8.55
CONN-KLS1-DC-005A [mm]
  oval 2x4.5 hole 1 slot 3.5 at 90 deg: 1(6,0)
  oval 2x4 hole 1 slot 3 at 90 deg: 2(0,0)
  oval 4x2 hole 1 slot 3 at 0 deg: 3(3,-4.7)
  silkscreen extent -7.73,-4.85 6.88,4.47, body extent -7.74,-4.87 6.86,4.48, height 11.01
HY911130A [mm]
  round 1.75 hole 0.9: 1(5.72,-8.89) 2(4.45,-6.35) 3(3.18,-8.89) 4(1.91,-6.35) 5(0.64,-8.89) 6(-0.63,-6.35) 7(-1.9,-8.89) 8(-3.17,-6.35) 9(-4.44,-8.89) 10(-5.71,-6.35)
  round 1.9 hole 1.05: 11(6.625,4.9) 12(4.085,4.9) 13(-4.085,4.9) 14(-6.625,4.9)
  round 3.25 hole 3.25 unplated: MH(-5.715,0) MH(5.715,0)
  round 2.7 hole 1.65: SH(-7.745,-3.05) SH(7.745,-3.05)
  silkscreen extent -8,-10.5 8,11, body extent -7.94,-10.49 7.94,10.91, height 13.51
LQFP50P900X900X160-48N [mm] "LQFP, 48-Leads, Body 7,00x7,00mm, Pitch 0,50mm, IPC Medium Density"
  oval 1.4x0.3 smd mask+0.05: 1(-4.2,2.75) 2(-4.2,2.25) 3(-4.2,1.75) 4(-4.2,1.25) 5(-4.2,0.75) 6(-4.2,0.25) 7(-4.2,-0.25) 8(-4.2,-0.75) 9(-4.2,-1.25) 10(-4.2,-1.75) 11(-4.2,-2.25) 12(-4.2,-2.75) 25(4.2,-2.75) 26(4.2,-2.25) 27(4.2,-1.75) 28(4.2,-1.25) 29(4.2,-0.75) 30(4.2,-0.25) 31(4.2,0.25) 32(4.2,0.75) 33(4.2,1.25) 34(4.2,1.75) 35(4.2,2.25) 36(4.2,2.75)
  oval 0.3x1.4 smd mask+0.05: 13(-2.75,-4.2) 14(-2.25,-4.2) 15(-1.75,-4.2) 16(-1.25,-4.2) 17(-0.75,-4.2) 18(-0.25,-4.2) 19(0.25,-4.2) 20(0.75,-4.2) 21(1.25,-4.2) 22(1.75,-4.2) 23(2.25,-4.2) 24(2.75,-4.2) 37(2.75,4.2) 38(2.25,4.2) 39(1.75,4.2) 40(1.25,4.2) 41(0.75,4.2) 42(0.25,4.2) 43(-0.25,4.2) 44(-0.75,4.2) 45(-1.25,4.2) 46(-1.75,4.2) 47(-2.25,4.2) 48(-2.75,4.2)
  silkscreen extent -4.32,-3.1 3.1,3.57, body extent -4.5,-4.5 4.5,4.5, height 1.6
LQFP50P1600X1600X160-100N [mm] "LQFP, 100-Leads, Body 14,00x14,00mm, Pitch 0,50mm, IPC Medium Density"
  rrect50% 1.45x0.3 smd mask+0.05: 1(-7.725,6) 2(-7.725,5.5) 3(-7.725,5) 4(-7.725,4.5) 5(-7.725,4) 6(-7.725,3.5) 7(-7.725,3) 8(-7.725,2.5) 9(-7.725,2) 10(-7.725,1.5) 11(-7.725,1) 12(-7.725,0.5) 13(-7.725,0) 14(-7.725,-0.5) 15(-7.725,-1) 16(-7.725,-1.5) 17(-7.725,-2) 18(-7.725,-2.5) 19(-7.725,-3) 20(-7.725,-3.5) 21(-7.725,-4) 22(-7.725,-4.5) 23(-7.725,-5) 24(-7.725,-5.5) 25(-7.725,-6) 51(7.725,-6) 52(7.725,-5.5) 53(7.725,-5) 54(7.725,-4.5) 55(7.725,-4) 56(7.725,-3.5) 57(7.725,-3) 58(7.725,-2.5) 59(7.725,-2) 60(7.725,-1.5) 61(7.725,-1) 62(7.725,-0.5) 63(7.725,0) 64(7.725,0.5) 65(7.725,1) 66(7.725,1.5) 67(7.725,2) 68(7.725,2.5) 69(7.725,3) 70(7.725,3.5) 71(7.725,4) 72(7.725,4.5) 73(7.725,5) 74(7.725,5.5) 75(7.725,6)
  rrect50% 0.3x1.45 smd mask+0.05: 26(-6,-7.725) 27(-5.5,-7.725) 28(-5,-7.725) 29(-4.5,-7.725) 30(-4,-7.725) 31(-3.5,-7.725) 32(-3,-7.725) 33(-2.5,-7.725) 34(-2,-7.725) 35(-1.5,-7.725) 36(-1,-7.725) 37(-0.5,-7.725) 38(0,-7.725) 39(0.5,-7.725) 40(1,-7.725) 41(1.5,-7.725) 42(2,-7.725) 43(2.5,-7.725) 44(3,-7.725) 45(3.5,-7.725) 46(4,-7.725) 47(4.5,-7.725) 48(5,-7.725) 49(5.5,-7.725) 50(6,-7.725) 76(6,7.725) 77(5.5,7.725) 78(5,7.725) 79(4.5,7.725) 80(4,7.725) 81(3.5,7.725) 82(3,7.725) 83(2.5,7.725) 84(2,7.725) 85(1.5,7.725) 86(1,7.725) 87(0.5,7.725) 88(0,7.725) 89(-0.5,7.725) 90(-1,7.725) 91(-1.5,7.725) 92(-2,7.725) 93(-2.5,7.725) 94(-3,7.725) 95(-3.5,7.725) 96(-4,7.725) 97(-4.5,7.725) 98(-5,7.725) 99(-5.5,7.725) 100(-6,7.725)
  silkscreen extent -7.85,-6.6 6.6,6.82, body extent -8,-8 8,8, height 1.6
NC7WZ07 [mm]
  rect 1.1x0.35 smd paste+0 mask+0.05: 1(-0.77,0.65)
  rrect100% 1.1x0.35 smd paste+0 mask+0.05: 2(-0.77,0) 3(-0.77,-0.65) 4(0.77,-0.65) 5(0.77,0) 6(0.77,0.65)
  silkscreen extent -2.03,-1.25 1.05,1.25, body extent -1.45,-1.1 1.45,1.1, height 0.25
QFN40P500X500X90_HS-41N [mm] "QFN, 40-Leads, Body 5,00x5,00mm, Pitch 0,40mm, Thermal Pad 3,70x3,70mm, IPC Medium Density"
  rrect60% 0.7x0.2 smd mask+0.05: 1(-2.425,1.8) 2(-2.425,1.4) 3(-2.425,1) 4(-2.425,0.6) 5(-2.425,0.2) 6(-2.425,-0.2) 7(-2.425,-0.6) 8(-2.425,-1) 9(-2.425,-1.4) 10(-2.425,-1.8) 21(2.425,-1.8) 22(2.425,-1.4) 23(2.425,-1) 24(2.425,-0.6) 25(2.425,-0.2) 26(2.425,0.2) 27(2.425,0.6) 28(2.425,1) 29(2.425,1.4) 30(2.425,1.8)
  rrect60% 0.2x0.7 smd mask+0.05: 11(-1.8,-2.425) 12(-1.4,-2.425) 13(-1,-2.425) 14(-0.6,-2.425) 15(-0.2,-2.425) 16(0.2,-2.425) 17(0.6,-2.425) 18(1,-2.425) 19(1.4,-2.425) 20(1.8,-2.425) 31(1.8,2.425) 32(1.4,2.425) 33(1,2.425) 34(0.6,2.425) 35(0.2,2.425) 36(-0.2,2.425) 37(-0.6,2.425) 38(-1,2.425) 39(-1.4,2.425) 40(-1.8,2.425)
  rect 3.7x3.7 smd mask+0.05: 41(0,0)
  silkscreen extent -3.42,-2.65 2.65,2.65, body extent -2.5,-2.5 2.5,2.5, height 0.9
QFN50P500X500X100_HS-29N [mm] "QFN, 28-Leads, Body 5,00x5,00mm, Pitch 0,50mm, Thermal Pad 3,13x3,13mm, IPC Medium Density"
  oval 0.9x0.25 smd mask+0.07: 1(-2.4,1.5) 2(-2.4,1) 3(-2.4,0.5) 4(-2.4,0) 5(-2.4,-0.5) 6(-2.4,-1) 7(-2.4,-1.5) 15(2.4,-1.5) 16(2.4,-1) 17(2.4,-0.5) 18(2.4,0) 19(2.4,0.5) 20(2.4,1) 21(2.4,1.5)
  oval 0.25x0.9 smd mask+0.07: 8(-1.5,-2.4) 9(-1,-2.4) 10(-0.5,-2.4) 11(0,-2.4) 12(0.5,-2.4) 13(1,-2.4) 14(1.5,-2.4) 22(1.5,2.4) 23(1,2.4) 24(0.5,2.4) 25(0,2.4) 26(-0.5,2.4) 27(-1,2.4) 28(-1.5,2.4)
  rect 3.2x3.2 smd mask+0.07: 29(0,0)
  silkscreen extent -3.43,-2.65 2.65,2.65, body extent -2.5,-2.5 2.5,2.5, height 1
QFN50P500X500X100_HS-33N [mm] "QFN, 32-Leads, Body 5,00x5,00mm, Pitch 0,50mm, Thermal Pad 3,30x3,30mm, IPC Medium Density"
  oval 0.69x0.25 smd mask+0.05: 1(-2.375,1.75) 2(-2.375,1.25) 3(-2.375,0.75) 4(-2.375,0.25) 5(-2.375,-0.25) 6(-2.375,-0.75) 7(-2.375,-1.25) 8(-2.375,-1.75) 17(2.375,-1.75) 18(2.375,-1.25) 19(2.375,-0.75) 20(2.375,-0.25) 21(2.375,0.25) 22(2.375,0.75) 23(2.375,1.25) 24(2.375,1.75)
  oval 0.25x0.69 smd mask+0.05: 9(-1.75,-2.375) 10(-1.25,-2.375) 11(-0.75,-2.375) 12(-0.25,-2.375) 13(0.25,-2.375) 14(0.75,-2.375) 15(1.25,-2.375) 16(1.75,-2.375) 25(1.75,2.375) 26(1.25,2.375) 27(0.75,2.375) 28(0.25,2.375) 29(-0.25,2.375) 30(-0.75,2.375) 31(-1.25,2.375) 32(-1.75,2.375)
  rect 3.2x3.2 smd paste-1.6 mask+0.05: 33(0,0)
  silkscreen extent -3.47,2.42 -3.23,2.67, body extent -2.55,-2.55 2.55,2.55, height 1
SOD-128 [mm] "SODFL, 2-Leads, Body 2,45x4,70mm, IPC Medium Density"
  rect 1.4x2.1 smd: A(2.2,0) C(-2.2,0)
  silkscreen extent -2.85,1.3 -2.75,1.4, body extent -2.35,-1.3 2.35,1.3, height 1.11
SODFL160X50-2N [mm] "SOD−523 CASE 502, SODFL, 2-Leads, Body 0,80x1,60mm, IPC Medium Density"
  rrect20% 0.55x0.5 smd mask+0.05: A(0.75,0) C(-0.75,0)
  silkscreen extent -1.02,0.45 -0.93,0.55, body extent -0.85,-0.44 0.85,0.44, height 0.72
SOIC127P600X175-8N [mm] "SOIC, 8-Leads, Body 4,90x3,90mm, Pitch 1,27mm, IPC Medium Density"
  rrect50% 1.3x0.6 smd mask+0.06: 1(-2.65,1.905) 2(-2.65,0.635) 3(-2.65,-0.635) 4(-2.65,-1.905) 5(2.65,-1.905) 6(2.65,-0.635) 7(2.65,0.635) 8(2.65,1.905)
  silkscreen extent -2.77,-2.5 1.6,2.88, body extent -3,-2.5 3,2.5, height 1.75
SOT65P210X110-5N [mm] "SOT23, 5-Leads, Body 2,00x2,10mm, Pitch 0,65mm, IPC Medium Density"
  rect 0.8x0.4 smd mask+0.05: 1(-1.075,0.65) 2(-1.075,0) 3(-1.075,-0.65) 4(1.075,-0.65) 5(1.075,0.65)
  silkscreen extent -1.2,-1.1 0.3,1.52, body extent -1.2,-1.1 1.2,1.1, height 1.1
SOT95P237X89-3N [mm] "SOT23, 3-Leads, Body 3,10x2,37mm, Pitch 0,95mm, IPC Medium Density"
  rect 1x0.56 smd mask+0.05: 1(-1.2,0.95) 2(-1.2,-0.95) 3(1.2,0)
  silkscreen extent -1.32,-1.7 0.7,1.82, body extent -1.32,-1.7 1.32,1.7, height 0.89
SOT95P251X112-3N [mm] "SOT23, 3-Leads, Body 2,92x2,51mm, Pitch 0,95mm, IPC Medium Density"
  rrect10% 1.4x1 smd mask+0.05: 1(-1.235,0.95) 2(-1.235,-0.95) 3(1.235,0)
  silkscreen extent -1.36,-1.5 0.76,1.95, body extent -1.36,-1.52 1.36,1.52, height 1.12
SOT95P280X125-5N [mm] "SOT23, 5-Leads, Body 2,90x2,80mm, Pitch 0,95mm, IPC Medium Density"
  rect 1x0.6 smd mask+0.05: 1(-1.375,0.95) 2(-1.375,0) 3(-1.375,-0.95) 4(1.375,-0.95) 5(1.375,0.95)
  silkscreen extent -1.5,-1.55 0.5,1.93, body extent -1.5,-1.53 1.5,1.53, height 1.25
T525D337M006ATE025 [mm] "Molded Capacitor, 2-Leads, Body 7,30x4,30mm, IPC Medium Density"
  rect 2.75x2.7 smd: 1(-3.1,0) 2(3.1,0)
  silkscreen extent -4.57,-2.3 3.8,2.3, body extent -3.8,-2.3 3.8,2.3, height 3.05
TE_1-1734248-5 [mm] "CONN FPC VERT 15POS 1MM SMD"
  rect 0.6x1.85 smd mask+0.05: 1(-7,-2.025) 2(-6,-2.025) 3(-5,-2.025) 4(-4,-2.025) 5(-3,-2.025) 6(-2,-2.025) 7(-1,-2.025) 8(0,-2.025) 9(1,-2.025) 10(2,-2.025) 11(3,-2.025) 12(4,-2.025) 13(5,-2.025) 14(6,-2.025) 15(7,-2.025)
  rect 0.6x1.65 smd mask+0.05: 1_1(-7,1.725) 2_1(-6,1.725) 3_1(-5,1.725) 4_1(-4,1.725) 5_1(-3,1.725) 6_1(-2,1.725) 7_1(-1,1.725) 8_1(0,1.725) 9_1(1,1.725) 10_1(2,1.725) 11_1(3,1.725) 12_1(4,1.725) 13_1(5,1.725) 14_1(6,1.725) 15_1(7,1.725)
  silkscreen extent -11.2,-3.72 11.2,2, body extent -11.2,-2.42 11.2,2.42, height 7.7
TL3301_Tact_SW [mm]
  rrect10% 2.1x1.4 smd mask+0.05: 1(-4.55,-2.25) 2(4.55,-2.25) 3(-4.55,2.25) 4(4.55,2.25)
  silkscreen extent -1.5,-1 1.5,1, body extent -5,-3 5,3, height 7.41
"USB2.0 MICRO AB SMD" [mm] "CONN RCPT MICRO USB AB 5P SMD RA"
  rect 0.4x1.35 smd mask+0.07: 1(1.3,2.675) 2(0.65,2.675) 3(0,2.675) 4(-0.65,2.675) 5(-1.3,2.675)
  oval 1x1.9 hole 0.65 slot 1.35 at 90 deg mask+0: SH(-4.175,0) SH(4.175,0)
  oval 1.1x1.3 hole 0.7 slot 0.9 at 90 deg mask+0.1: SH(-2.225,3) SH(2.225,3)
  rect 2.9x1.9 smd: SH(0,0)
  S1 (SIG) region: 4.106,0.949 4.138,0.947 4.169,0.943 4.2,0.937 4.23,0.93 4.26,0.921 4.29,0.91 4.319,0.898 4.347,0.885 4.375,0.87 4.402,0.853 4.428,0.835 4.453,0.816 4.476,0.796 4.499,0.774 4.521,0.751 4.541,0.728 4.56,0.703 4.578,0.677 4.595,0.65 4.61,0.622 4.623,0.594 4.635,0.565 4.646,0.535 4.655,0.505 4.662,0.475 4.668,0.444 4.672,0.413 4.674,0.381 4.675,0.35 4.675,-0.35 4.674,-0.381 4.672,-0.413 4.668,-0.444 4.662,-0.475 4.655,-0.505 4.646,-0.535 4.635,-0.565 4.623,-0.594 4.61,-0.622 4.595,-0.65 4.578,-0.677 4.56,-0.703 4.541,-0.728 4.521,-0.751 4.499,-0.774 4.476,-0.796 4.453,-0.816 4.428,-0.835 4.402,-0.853 4.375,-0.87 4.347,-0.885 4.319,-0.898 4.29,-0.91 4.26,-0.921 4.23,-0.93 4.2,-0.937 4.169,-0.943 4.138,-0.947 4.106,-0.949 4.075,-0.95 3.3,-0.95 3.3,0.95 4.075,0.95
  S1 (SIG) region: -3.3,-0.95 -4.075,-0.95 -4.106,-0.949 -4.138,-0.947 -4.169,-0.943 -4.2,-0.937 -4.23,-0.93 -4.26,-0.921 -4.29,-0.91 -4.319,-0.898 -4.347,-0.885 -4.375,-0.87 -4.402,-0.853 -4.428,-0.835 -4.453,-0.816 -4.476,-0.796 -4.499,-0.774 -4.521,-0.751 -4.541,-0.728 -4.56,-0.703 -4.578,-0.677 -4.595,-0.65 -4.61,-0.622 -4.623,-0.594 -4.635,-0.565 -4.646,-0.535 -4.655,-0.505 -4.662,-0.475 -4.668,-0.444 -4.672,-0.413 -4.674,-0.381 -4.675,-0.35 -4.675,0.35 -4.674,0.381 -4.672,0.413 -4.668,0.444 -4.662,0.475 -4.655,0.505 -4.646,0.535 -4.635,0.565 -4.623,0.594 -4.61,0.622 -4.595,0.65 -4.578,0.677 -4.56,0.703 -4.541,0.728 -4.521,0.751 -4.499,0.774 -4.476,0.796 -4.453,0.816 -4.428,0.835 -4.402,0.853 -4.375,0.87 -4.347,0.885 -4.319,0.898 -4.29,0.91 -4.26,0.921 -4.23,0.93 -4.2,0.937 -4.169,0.943 -4.138,0.947 -4.106,0.949 -4.075,0.95 -3.3,0.95
  S10 (SIG) region: 4.106,0.949 4.138,0.947 4.169,0.943 4.2,0.937 4.23,0.93 4.26,0.921 4.29,0.91 4.319,0.898 4.347,0.885 4.375,0.87 4.402,0.853 4.428,0.835 4.453,0.816 4.476,0.796 4.499,0.774 4.521,0.751 4.541,0.728 4.56,0.703 4.578,0.677 4.595,0.65 4.61,0.622 4.623,0.594 4.635,0.565 4.646,0.535 4.655,0.505 4.662,0.475 4.668,0.444 4.672,0.413 4.674,0.381 4.675,0.35 4.675,-0.35 4.674,-0.381 4.672,-0.413 4.668,-0.444 4.662,-0.475 4.655,-0.505 4.646,-0.535 4.635,-0.565 4.623,-0.594 4.61,-0.622 4.595,-0.65 4.578,-0.677 4.56,-0.703 4.541,-0.728 4.521,-0.751 4.499,-0.774 4.476,-0.796 4.453,-0.816 4.428,-0.835 4.402,-0.853 4.375,-0.87 4.347,-0.885 4.319,-0.898 4.29,-0.91 4.26,-0.921 4.23,-0.93 4.2,-0.937 4.169,-0.943 4.138,-0.947 4.106,-0.949 4.075,-0.95 3.3,-0.95 3.3,0.95 4.075,0.95
  S10 (SIG) region: -3.3,-0.95 -4.075,-0.95 -4.106,-0.949 -4.138,-0.947 -4.169,-0.943 -4.2,-0.937 -4.23,-0.93 -4.26,-0.921 -4.29,-0.91 -4.319,-0.898 -4.347,-0.885 -4.375,-0.87 -4.402,-0.853 -4.428,-0.835 -4.453,-0.816 -4.476,-0.796 -4.499,-0.774 -4.521,-0.751 -4.541,-0.728 -4.56,-0.703 -4.578,-0.677 -4.595,-0.65 -4.61,-0.622 -4.623,-0.594 -4.635,-0.565 -4.646,-0.535 -4.655,-0.505 -4.662,-0.475 -4.668,-0.444 -4.672,-0.413 -4.674,-0.381 -4.675,-0.35 -4.675,0.35 -4.674,0.381 -4.672,0.413 -4.668,0.444 -4.662,0.475 -4.655,0.505 -4.646,0.535 -4.635,0.565 -4.623,0.594 -4.61,0.622 -4.595,0.65 -4.578,0.677 -4.56,0.703 -4.541,0.728 -4.521,0.751 -4.499,0.774 -4.476,0.796 -4.453,0.816 -4.428,0.835 -4.402,0.853 -4.375,0.87 -4.347,0.885 -4.319,0.898 -4.29,0.91 -4.26,0.921 -4.23,0.93 -4.2,0.937 -4.169,0.943 -4.138,0.947 -4.106,0.949 -4.075,0.95 -3.3,0.95
  Keep-Out Layer board cut-out: 3.75,-1.45 -3.75,-1.45 -2.8,-1.45 -2.8,0.125 -2.799,0.147 -2.798,0.169 -2.795,0.191 -2.791,0.213 -2.786,0.235 -2.779,0.256 -2.772,0.277 -2.763,0.298 -2.754,0.318 -2.743,0.338 -2.731,0.356 -2.719,0.375 -2.705,0.392 -2.691,0.409 -2.676,0.426 -2.659,0.441 -2.642,0.455 -2.625,0.469 -2.606,0.481 -2.587,0.493 -2.568,0.504 -2.548,0.513 -2.527,0.522 -2.506,0.529 -2.485,0.536 -2.463,0.541 -2.441,0.545 -2.419,0.548 -2.397,0.549 -2.375,0.55 -2.353,0.549 -2.331,0.548 -2.309,0.545 -2.287,0.541 -2.265,0.536 -2.244,0.529 -2.223,0.522 -2.202,0.513 -2.182,0.504 -2.163,0.493 -2.144,0.481 -2.125,0.469 -2.108,0.455 -2.091,0.441 -2.074,0.426 -2.059,0.409 -2.045,0.392 -2.031,0.375 -2.019,0.356 -2.007,0.337 -1.996,0.318 -1.987,0.298 -1.978,0.277 -1.971,0.256 -1.964,0.235 -1.959,0.213 -1.955,0.191 -1.952,0.169 -1.951,0.147 -1.95,0.125 -1.95,-1.45 1.95,-1.45 1.95,0.125 1.951,0.147 1.952,0.169 1.955,0.191 1.959,0.213 1.964,0.235 1.971,0.256 1.978,0.277 1.987,0.298 1.996,0.318 2.007,0.337 2.019,0.356 2.031,0.375 2.045,0.392 2.059,0.409 2.074,0.426 2.091,0.441 2.108,0.455 2.125,0.469 2.144,0.481 2.163,0.493 2.182,0.504 2.202,0.513 2.223,0.522 2.244,0.529 2.265,0.536 2.287,0.541 2.309,0.545 2.331,0.548 2.353,0.549 2.375,0.55 2.397,0.549 2.419,0.548 2.441,0.545 2.463,0.541 2.485,0.536 2.506,0.529 2.527,0.522 2.548,0.513 2.568,0.504 2.587,0.493 2.606,0.481 2.625,0.469 2.642,0.455 2.659,0.441 2.676,0.426 2.691,0.409 2.705,0.392 2.719,0.375 2.731,0.356 2.743,0.338 2.754,0.318 2.763,0.298 2.772,0.277 2.779,0.256 2.786,0.235 2.791,0.213 2.795,0.191 2.798,0.169 2.799,0.147 2.8,0.125 2.8,-1.45
  silkscreen extent -3.85,1.27 3.75,3.04, body extent -4.33,-2.8 4.33,3.1, height 2.72
"USB2.0 MICRO B SMD" [mm] "CONN RCPT USB2.0 MICRO B SMD R/A"
  rrect10% 0.4x1.35 smd mask+0.05: 1(-1.3,1.338) 2(-0.65,1.338) 3(0,1.338) 4(0.65,1.338) 5(1.3,1.338)
  rrect10% 1.8x1.9 smd mask+0.05: SH(-3.8,-1.338) SH(3.8,-1.338)
  rrect10% 2.1x1.6 smd mask+0.05: SH(-3.1,1.212) SH(3.1,1.212)
  rrect10% 1.9x1.9 smd mask+0.05: SH(-1.2,-1.338) SH(1.2,-1.338)
  silkscreen extent -3.75,-2.79 3.75,2.4, body extent -3.96,-4.06 3.96,1.61, height 2.57
VSON50P150X100-8N [mm] "VSON, 8-Leads, Body 2,00x1,50mm, Pitch 0,50mm, IPC Medium Density"
  rect 0.7x0.25 smd mask+0.05: 1(-0.645,0.75) 2(-0.645,0.25) 3(-0.645,-0.25) 4(-0.645,-0.75) 5(0.645,-0.75) 6(0.645,-0.25) 7(0.645,0.25) 8(0.645,0.75)
  silkscreen extent -1.25,-1.2 0.8,1.25, body extent -0.8,-1.05 0.8,1.05, height 1
VSON50P300X100_HS-11N [mm] "VSON, 10-Leads, Body 3,00x3,00mm, Pitch 0,50mm, Thermal Pad 2,40x1,49mm, IPC Medium Density"
  rrect50% 0.6x0.25 smd mask+0.05: 1(-1.395,1) 2(-1.395,0.5) 3(-1.395,0) 4(-1.395,-0.5) 5(-1.395,-1) 6(1.395,-1) 7(1.395,-0.5) 8(1.395,0) 9(1.395,0.5) 10(1.395,1)
  round 0.025 smd mask+0.05: 11(0,0)
  S1 (SIG) region: -0.312,-1.7 -0.336,-1.695 -0.357,-1.682 -0.37,-1.661 -0.375,-1.637 -0.375,-1.637 -0.375,-1.25 -0.379,-1.23 -0.39,-1.214 -0.407,-1.203 -0.426,-1.199 -0.426,-1.199 -0.744,-1.199 -0.775,-1.193 -0.801,-1.175 -0.819,-1.149 -0.825,-1.117 -0.825,-1.117 -0.825,1.118 -0.819,1.149 -0.801,1.176 -0.774,1.194 -0.742,1.2 -0.742,1.2 -0.425,1.2 -0.406,1.204 -0.39,1.215 -0.379,1.231 -0.375,1.25 -0.375,1.25 -0.375,1.638 -0.37,1.661 -0.357,1.682 -0.336,1.695 -0.312,1.7 -0.312,1.7 -0.187,1.7 -0.164,1.695 -0.143,1.682 -0.13,1.661 -0.125,1.638 -0.125,1.638 -0.125,1.25 -0.121,1.231 -0.11,1.215 -0.094,1.204 -0.075,1.2 -0.075,1.2 0.075,1.2 0.094,1.204 0.11,1.215 0.121,1.231 0.125,1.25 0.125,1.25 0.125,1.638 0.13,1.661 0.143,1.682 0.164,1.695 0.188,1.7 0.188,1.7 0.313,1.7 0.336,1.695 0.357,1.682 0.37,1.661 0.375,1.638 0.375,1.638 0.375,1.25 0.379,1.231 0.39,1.215 0.406,1.204 0.425,1.2 0.425,1.2 0.743,1.2 0.774,1.194 0.801,1.176 0.819,1.149 0.825,1.118 0.825,1.118 0.825,-1.117 0.819,-1.149 0.801,-1.176 0.774,-1.194 0.743,-1.2 0.743,-1.2 0.425,-1.2 0.406,-1.204 0.39,-1.215 0.379,-1.231 0.375,-1.25 0.375,-1.25 0.375,-1.637 0.37,-1.661 0.357,-1.682 0.336,-1.695 0.313,-1.7 0.313,-1.7 0.188,-1.7 0.164,-1.695 0.143,-1.682 0.13,-1.661 0.125,-1.637 0.125,-1.637 0.125,-1.25 0.121,-1.231 0.11,-1.215 0.094,-1.204 0.075,-1.2 0.075,-1.2 -0.075,-1.2 -0.094,-1.204 -0.11,-1.215 -0.121,-1.231 -0.125,-1.25 -0.125,-1.25 -0.125,-1.637 -0.13,-1.661 -0.143,-1.682 -0.164,-1.695 -0.187,-1.7 -0.187,-1.7
  silkscreen extent -2.15,-1.7 1.7,1.75, body extent -1.55,-1.55 1.55,1.55, height 1
WSON2X2-10/SON40P200X80_HS-11N [mm] "SON, 10-Leads, Body 2,00x2,00mm, Pitch 0,40mm, Thermal Pad 1,50x0,69mm, IPC Medium Density"
  rect 0.7x0.2 smd mask+0.05: 1(-0.945,0.8) 2(-0.945,0.4) 3(-0.945,0) 4(-0.945,-0.4) 5(-0.945,-0.8) 6(0.945,-0.8) 7(0.945,-0.4) 8(0.945,0) 9(0.945,0.4) 10(0.945,0.8)
  rect 0.69x1.5 smd mask+0.05: 11(0,0)
  silkscreen extent -1.5,-1.2 1.05,1.25, body extent -1.05,-1.05 1.05,1.05, height 0.8
WSON8X6-SON127P800X80_HS-9N [mm] "SON, 8-Leads, Body 6,00x8,00mm, Pitch 1,27mm, Thermal Pad 4,30x3,40mm, IPC Medium Density"
  rrect75% 0.95x0.45 smd mask+0.07: 1(-3.87,1.905) 2(-3.87,0.635) 3(-3.87,-0.635) 4(-3.87,-1.905) 5(3.87,-1.905) 6(3.87,-0.635) 7(3.87,0.635) 8(3.87,1.905)
  rrect5% 3.4x4.3 smd paste-1.7 mask+0.07: 9(0,0)
  silkscreen extent -4.65,-3.2 4.2,3.25, body extent -4.05,-3.05 4.05,3.05, height 0.8
XTAL_2520 [mm]
  rrect10% 0.9x0.8 smd mask+0.05: 1(-0.925,-0.725) 2(0.925,-0.725) 3(0.925,0.725) 4(-0.925,0.725)
  silkscreen extent -1.6,-1.33 -0.54,-0.36, body extent -1.25,-1 1.25,1, height 0.8